# EAGLE board Micromouse2 (EAGLE 6.3)
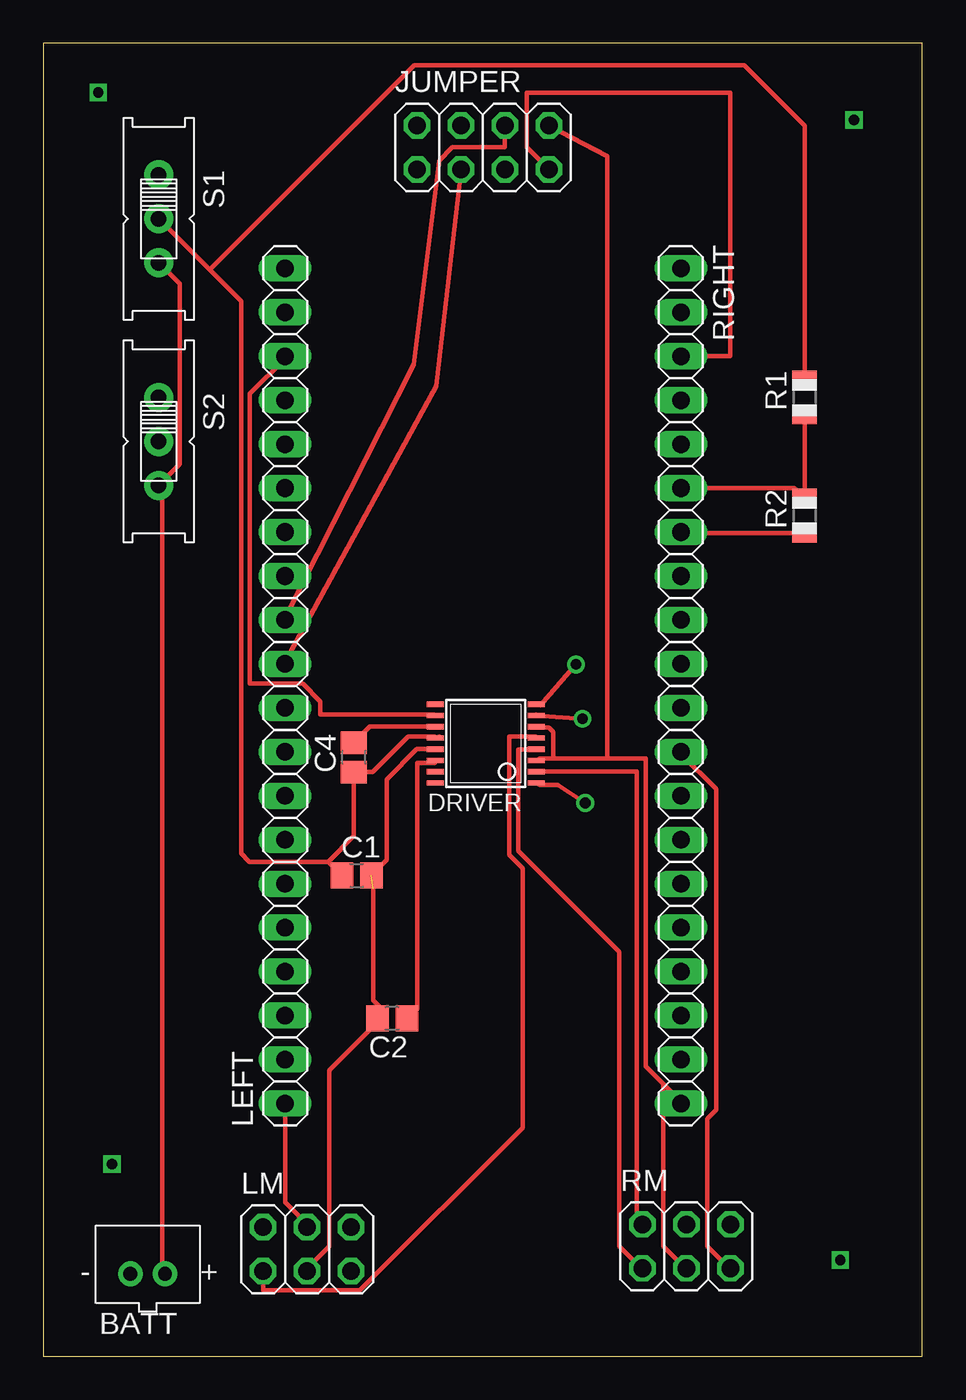
[diagram p0: board, top side]
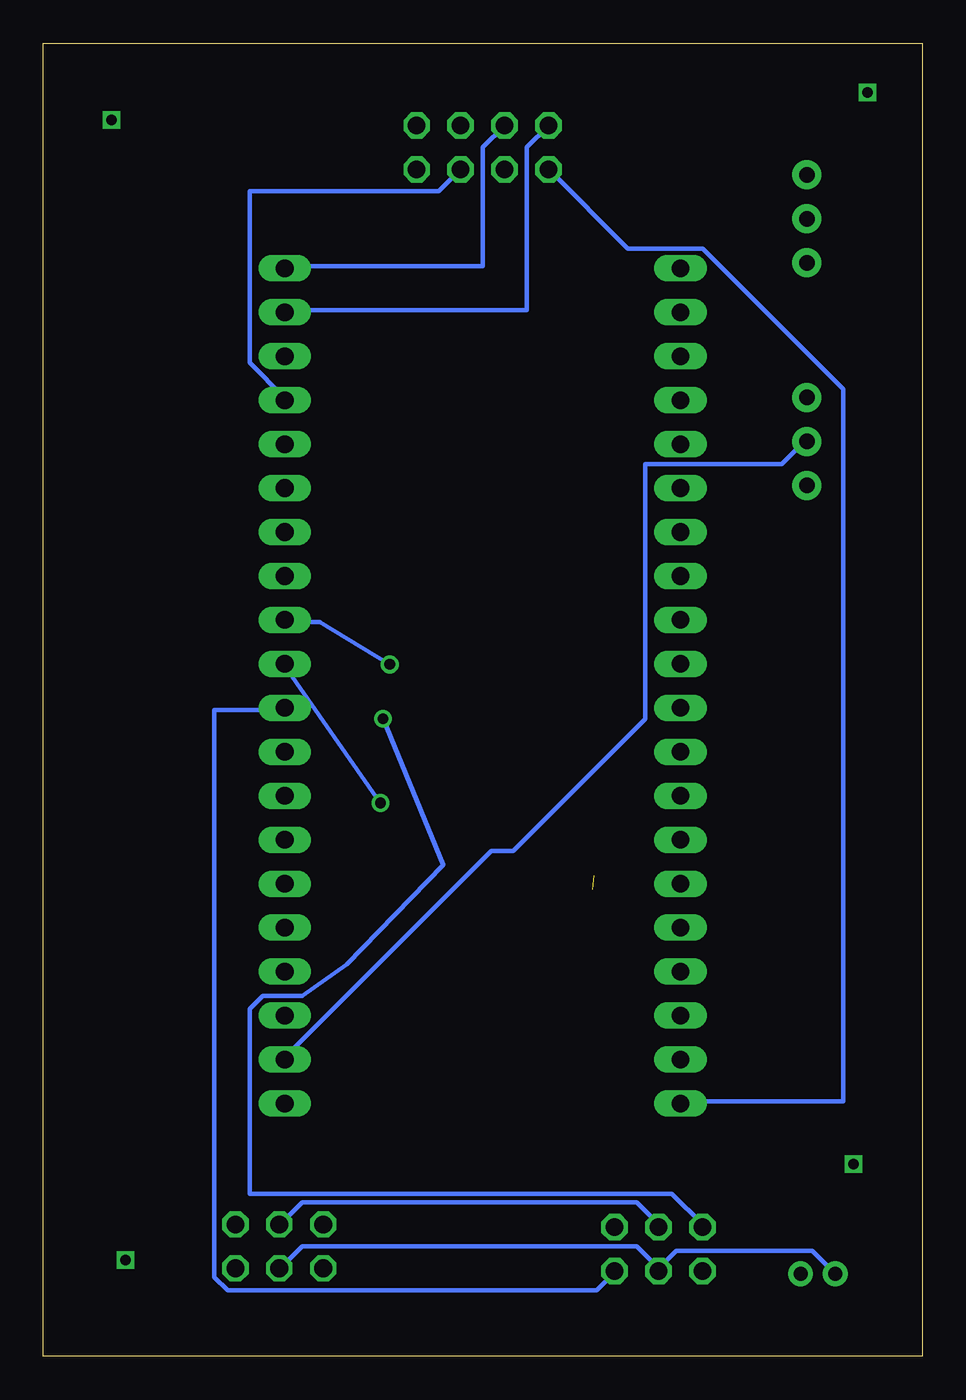
[diagram p1: board, bottom side, seen from below]

Size 50.78 x 75.87 mm. Coordinates in mm from the lower left corner, seen from the top.
Outline: 0,0 50.78,0 50.78,75.87 0,75.87 0,0
Copper layers (1*16): Top 0.035mm / dielectric 1.5mm / Bottom 0.035mm
Design rules "default": minimum track width 10mil, minimum drill 24mil, track to track 8mil, track to pad 8mil, pad to pad 8mil, via to via 8mil, smd to smd 8mil, copper to edge 40mil, drill to drill 8mil, minimum pad ring 10mil, minimum via ring 8mil, stop-mask expansion 4mil, vias tented up to drill 0mil, thermal gap 10mil

## Footprints (pad centres in the part's own frame; a part is rotated, then mirrored left to right if it is on the bottom)
JST-PH-2-THM = drill 0.8 pad 1.422: 1 1,0; 2 -1,0
C0805 = smd 1.3 x 1.5: 1 -0.85,0; 2 0.85,0
TSSOP16 = smd 0.305 x 0.991: 1 -2.275,-2.918; 2 -1.625,-2.918; 3 -0.975,-2.918; 4 -0.325,-2.918; 5 0.325,-2.918; 6 0.975,-2.918; 7 1.625,-2.918; 8 2.275,-2.918; 9 2.275,2.918; 10 1.625,2.918; 11 0.975,2.918; 12 0.325,2.918; 13 -0.325,2.918; 14 -0.975,2.918; 15 -1.625,2.918; 16 -2.275,2.918
2X04 = drill 1.016 octagon: 1 -3.81,-1.27; 2 -3.81,1.27; 3 -1.27,-1.27; 4 -1.27,1.27; 5 1.27,-1.27; 6 1.27,1.27; 7 3.81,-1.27; 8 3.81,1.27
1X20 = drill 1.016 long: 1 -24.13,0; 2 -21.59,0; 3 -19.05,0; 4 -16.51,0; 5 -13.97,0; 6 -11.43,0; 7 -8.89,0; 8 -6.35,0; 9 -3.81,0; 10 -1.27,0; 11 1.27,0; 12 3.81,0; 13 6.35,0; 14 8.89,0; 15 11.43,0; 16 13.97,0; 17 16.51,0; 18 19.05,0; 19 21.59,0; 20 24.13,0
2X03 = drill 1.016 octagon: 1 -2.54,-1.27; 2 -2.54,1.27; 3 0,-1.27; 4 0,1.27; 5 2.54,-1.27; 6 2.54,1.27
R0805 = smd 1.1 x 1.4: 1 -1,0; 2 1,0
EG1218 = drill 0.9 pad 1.676: O -2.54,0; P 0,0; S 2.54,0

## Placement (x,y rotation side)
BATT  [JST-PH-2-THM]  6.03,4.76 0 top
C1  10uF  [C0805]  18.1,27.78 0 top
C2  2.2uF  [C0805]  20.16,19.53 180 top
C4  .01uF  [C0805]  17.94,34.61 90 top
DRIVER  LMX2322  [TSSOP16]  25.56,35.4 90 top
JUMPER  [2X04]  25.4,69.85 0 top
LEFT  [1X20]  13.97,38.73 90 top
LM  [2X03]  15.24,6.19 0 top
R1  [R0805]  43.97,55.4 90 top
R2  [R0805]  43.97,48.58 90 top
RIGHT  [1X20]  36.83,38.73 270 top
RM  [2X03]  37.15,6.35 0 top
S1  [EG1218]  6.67,65.72 270 top
S2  [EG1218]  6.67,52.86 270 top

## Library data of the parts
BATT C1 C2 C4 LEFT R1 R2 RIGHT S1 S2 = adafruit
DRIVER = national-semiconductor; OC_FARNELL: unknown; OC_NEWARK: unknown
JUMPER LM RM = pinhead

## Nets
+3V3: JUMPER.1 LEFT.1 LM.4 RM.4
A1IN: LEFT.15
A2IN: LEFT.16
AIN1: DRIVER.16
AIN2: DRIVER.15
B1IN: DRIVER.9
B2IN: DRIVER.10 LEFT.18
BATT_CHECK: R1.1 R2.2 RIGHT.6
CHECK_EN: R2.1 RIGHT.7
FSENS_EN: JUMPER.6 LEFT.12
GND: BATT.2 C1.2 C2.2 DRIVER.3 DRIVER.6 DRIVER.13 JUMPER.8 LM.3 RIGHT.20 RM.3
LF_SENS: JUMPER.4 RIGHT.1
LS_SENS: JUMPER.7 RIGHT.3
N$1: DRIVER.2 RM.2
N$2: C2.1 DRIVER.14
N$3: DRIVER.4 RM.1
N$4: C4.2 DRIVER.11
N$5: DRIVER.7 LM.2
N$6: DRIVER.5 LM.1
N$7: BATT.1 S1.S S2.S
N$8: DRIVER.8 RIGHT.9
N$9: DRIVER.1 RIGHT.10
RF_SENS: JUMPER.2 RIGHT.2
RS_SENS: JUMPER.5 RIGHT.4
SSENS_EN: JUMPER.3 LEFT.11
TICK1: RIGHT.12 RM.5
TICK2: LM.5 RIGHT.11
VCC: C1.1 C4.1 DRIVER.12 R1.2 S1.P
VDD: RIGHT.19 S2.P

## Tracks (layer width: path | path; a pad name or v marks a point on that pad's centre or on a via)
+3V3
  Top 0.254: LEFT.1 13.97,8.89 15.24,7.62 LM.4
  Bottom 0.254: RM.4 37.08,7.62 35.81,8.89 16.51,8.89 15.24,7.62 LM.4 | JUMPER.1 17.02,64.01 12.7,64.01 4.57,55.88 4.57,14.73 13.97,14.73 LEFT.1
B2IN
  Top 0.254: DRIVER.10 22.61,37.08 16,37.08 16,37.85 14.99,38.86 11.94,38.86 11.94,55.63 13.97,57.66 LEFT.18
BATT_CHECK
  Top 0.254: R1.1 R2.2 43.39,50.16 RIGHT.6
CHECK_EN
  Top 0.254: 36.51,47.62 36.35,47.78 36.32,47.75 36.83,47.75 RIGHT.7 36.88,47.58 R2.1
FSENS_EN
  Top 0.254: JUMPER.6 26.67,69.85 23.62,69.85 22.86,69.09 21.4,57.31 13.97,42.67 LEFT.12
GND  (1 unrouted)
  Top 0.254: 22.61,35.05 DRIVER.13 21.58,35.08 19.84,33.34 19.84,28.68 C1.2 | LM.3 15.24,5.08 16.51,6.35 16.51,16.51 19.3,19.3 C2.2 19.56,19.56 19.81,19.81 19.05,20.57 19.05,26.99 | 29.46,34.54 28.7,34.54 DRIVER.3 | 29.46,34.54 29.46,36.07 29.21,36.32 28.7,36.32 DRIVER.6 | 32.58,34.54 34.8,34.54 34.8,16.76 35.81,15.75 | 32.58,34.54 29.46,34.54 | 35.81,15.75 36.83,14.73 RIGHT.20 | 35.81,15.75 35.81,6.35 37.08,5.08 RM.3 | JUMPER.8 32.58,69.34 32.58,34.54
  Bottom 0.254: 15.24,5.08 14.22,6.1 6.35,6.1 5.08,4.83 BATT.2 | 15.24,5.08 16.51,6.35 35.81,6.35 37.08,5.08 RM.3 | 15.24,5.08 LM.3
LF_SENS
  Bottom 0.254: JUMPER.4 25.4,69.85 25.4,62.99 36.83,62.99 RIGHT.1
LS_SENS
  Top 0.254: JUMPER.7 27.94,69.85 27.94,73.03 39.69,73.03 39.69,57.78 RIGHT.3 36.83,57.91
N$1
  Top 0.254: DRIVER.2 28.7,33.78 34.29,33.78 34.29,7.87 34.54,7.62 RM.2
N$2
  Top 0.254: DRIVER.14 22.61,34.29 21.59,34.29 21.59,20.07 21.08,19.56 C2.1
N$3
  Top 0.254: DRIVER.4 28.45,35.05 27.43,35.05 27.43,29.21 33.27,23.37 33.27,6.35 34.54,5.08 RM.1
N$4
  Top 0.254: 22.86,36.32 DRIVER.11 18.86,36.38 C4.2
N$5  (via drill 0.61)
  Top 0.254: 28.45,37.08 DRIVER.7 v31.15,36.83
  Bottom 0.254: v31.15,36.83 27.69,28.38 33.24,22.64 35.81,20.83 38.1,20.83 38.86,20.07 38.86,9.4 14.48,9.4 12.7,7.62 LM.2
N$6
  Top 0.254: LM.1 12.7,3.81 18.29,3.81 27.69,13.21 27.69,28.19 26.92,28.96 26.92,35.81 28.45,35.81 DRIVER.5
N$7
  Top 0.254: BATT.1 6.86,4.83 6.86,50.29 S2.S 6.86,50.55 7.87,51.56 7.87,61.98 S1.S
N$8  (via drill 0.61)
  Top 0.254: v30.77,39.97 28.7,37.59 DRIVER.8
  Bottom 0.254: v30.77,39.97 34.8,42.42 36.83,42.42 RIGHT.9
N$9  (via drill 0.61)
  Top 0.254: v31.3,31.97 29.72,33.02 28.7,33.02 DRIVER.1
  Bottom 0.254: v31.3,31.97 36.83,39.88 RIGHT.10
N$10  (via drill 0.6)
  other vias: 3.17,73.03
N$11  (via drill 0.6)
  other vias: 46.83,71.44
N$12  (via drill 0.6)
  other vias: 46.04,5.56
N$13  (via drill 0.6)
  other vias: 3.97,11.11
RF_SENS
  Bottom 0.254: JUMPER.2 22.86,69.85 22.86,60.45 36.83,60.45 RIGHT.2
RS_SENS
  Bottom 0.254: JUMPER.5 27.94,67.31 38.86,67.31 38.86,57.4 36.83,55.37 RIGHT.4
SSENS_EN
  Top 0.254: JUMPER.3 22.7,56.07 13.97,40.13 LEFT.11
TICK1
  Top 0.254: RM.5 39.62,5.08 38.35,6.35 38.35,13.72 38.86,14.22 38.86,32.77 36.83,34.8 RIGHT.12
TICK2
  Bottom 0.254: LM.5 17.78,4.83 18.8,3.81 40.13,3.81 40.89,4.57 40.89,37.34 36.83,37.34 RIGHT.11
VCC
  Top 0.254: 22.86,35.81 DRIVER.12 22.61,35.81 21.08,35.81 19.03,33.76 C4.1 17.94,30.06 16.45,28.57 | 9.6,62.79 11.43,60.96 11.43,29.05 11.91,28.57 16.45,28.57 | 9.6,62.79 S1.P | R1.2 43.97,71.12 40.48,74.61 21.43,74.61 9.6,62.79 | 16.45,28.57 C1.1
VDD
  Bottom 0.254: RIGHT.19 36.83,17.27 24.89,29.21 23.62,29.21 16,36.83 16,51.56 8.13,51.56 6.86,52.83 S2.P